# Altium PCB ST7789_PCB.PcbDoc
Units mil, origin at the board's own origin, x right, y up, seen from the top; angles counter-clockwise.
Board outline 1640 x 725 mil, 2 copper layers (Top Layer, Bottom Layer); 9 components, 10 nets, 40 pads, 7 vias.
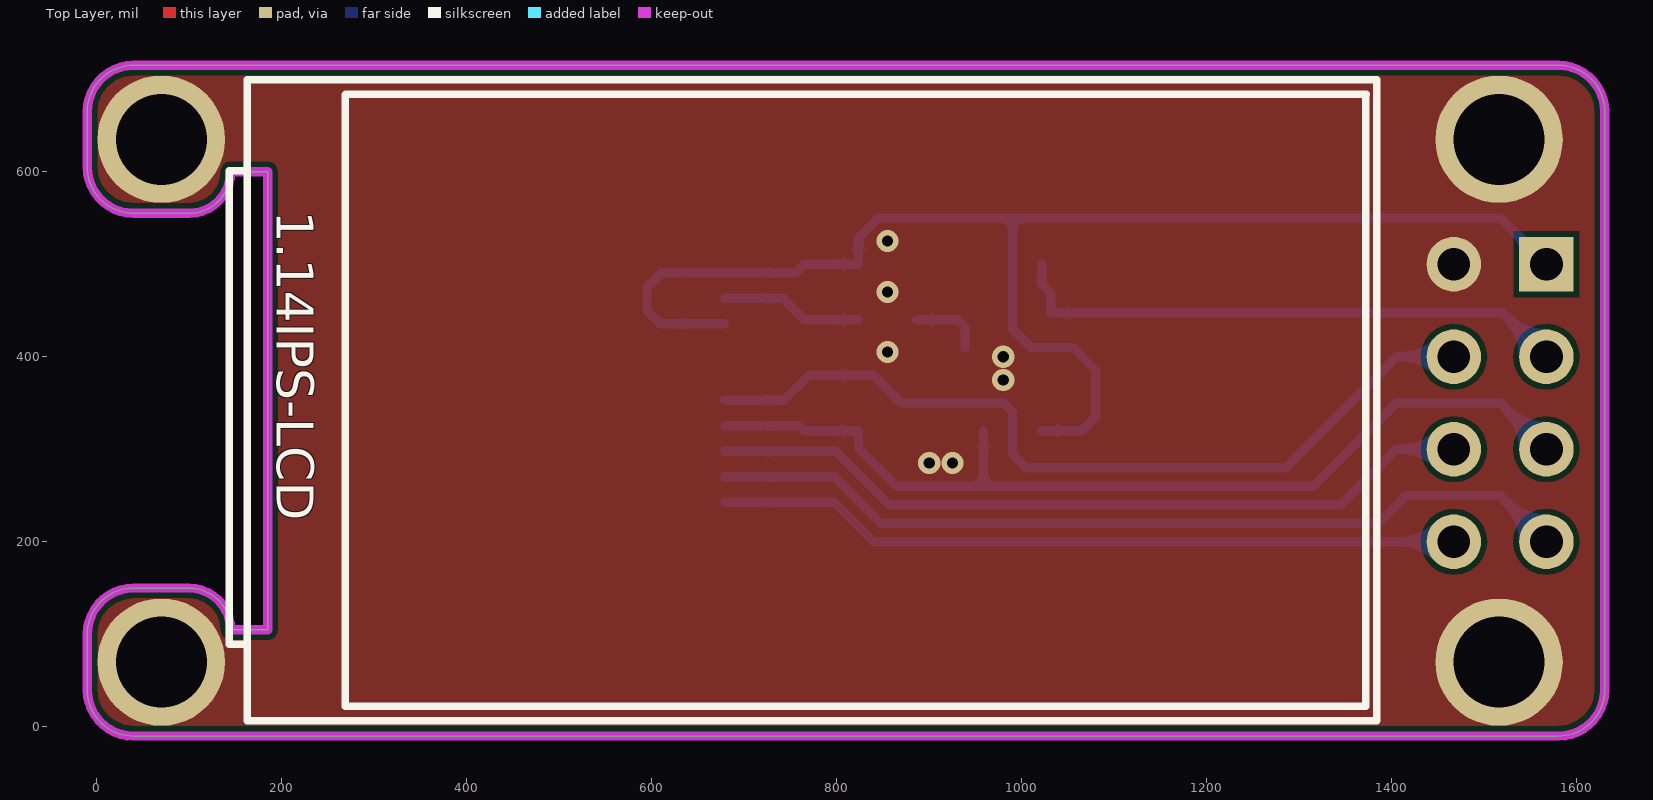
[diagram p0: Top Layer view]
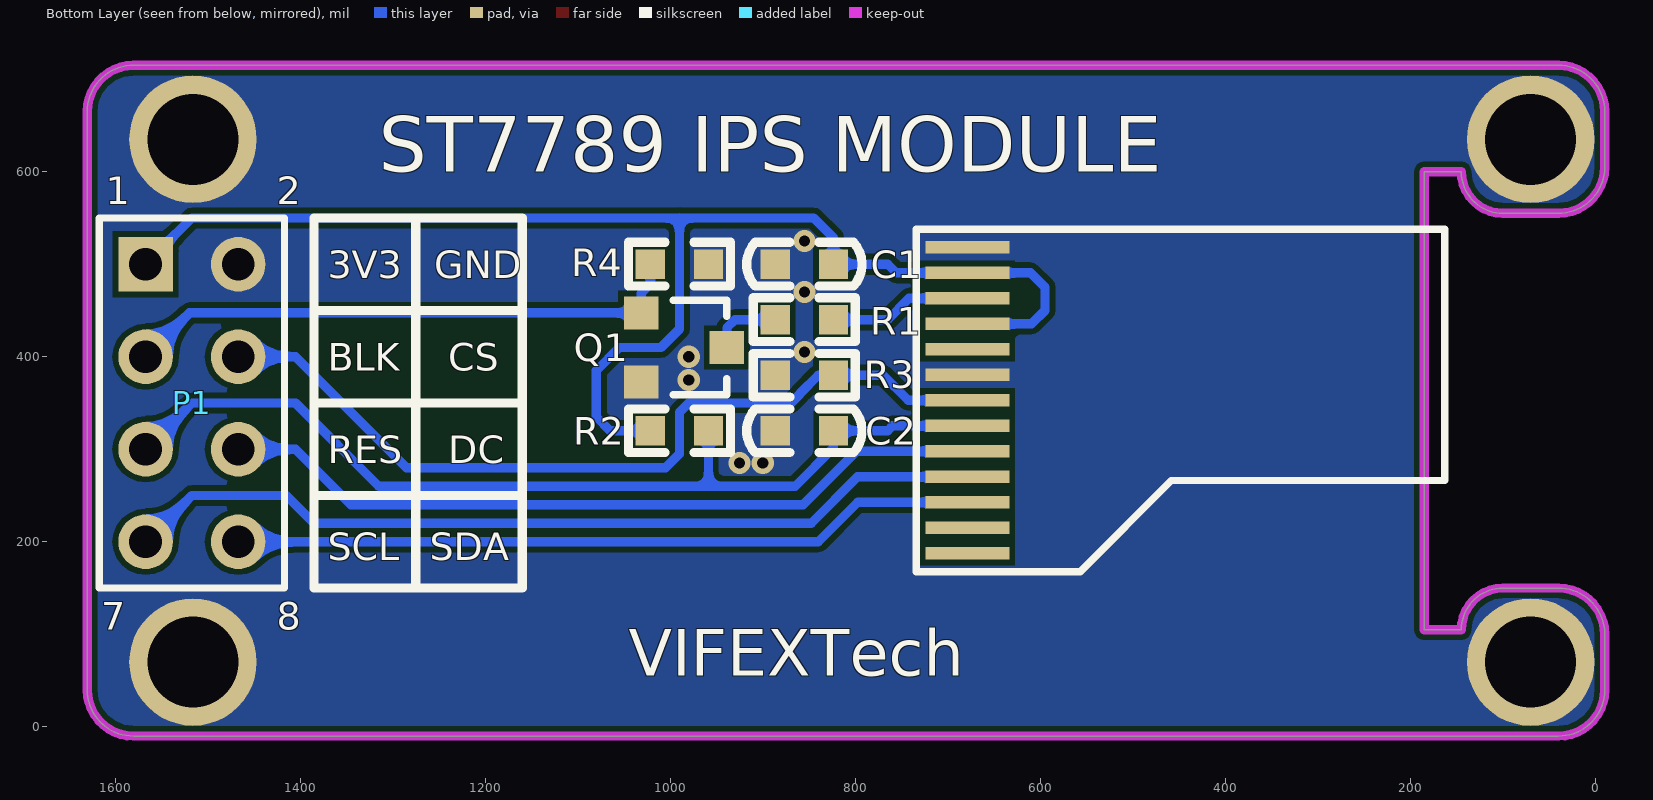
[diagram p1: Bottom Layer view, seen from below]

## Layer stack, top to bottom
Top Solder: solder mask 0.4, Solder Resist, Dk 3.5
Top Layer: signal copper 1.4
Dielectric 1: dielectric 12.6, FR-4, Dk 4.8
Bottom Layer: signal copper 1.4
Bottom Solder: solder mask 0.4, Solder Resist, Dk 3.5

## Board outline
40,-10 cw(c40,40) -10,40 -10,100 cw(c40,100) 40,150 100,150 cw(c100,105) 145,105 185,105 185,600 145,600 cw(c100,600) 100,555 40,555 cw(c40,605) -10,605 -10,665 cw(c40,665) 40,715 1580,715 cw(c1580,665) 1630,665 1630,40 cw(c1580,40) 1580,-10

## Design rules (kind name [scope] priority, off if disabled: settings)
Clearance [All] p1: gap=6
HoleSize [All] p1 off: absolutevalues=TRUE maxlimit=100 minlimit=1 maxpercent=80.000 minpercent=20.000
HoleToHoleClearance [All] p1 off: gap=10 allowstackedmicrovias=TRUE
LayerPairs [All] p1 off: enforce=TRUE
MinimumSolderMaskSliver [All] p1 off: minsoldermaskwidth=10
NetAntennae [All] p1 off: netantennaetolerance=0
NetAntennae NetAntennae_1 [All] p2 off: netantennaetolerance=0
PlaneConnect [All] p1: planeconnectstyle=Direct reliefexpansion=20 reliefentries=4 reliefconductorwidth=10 reliefairgap=10
PolygonConnect [All] p1: connectstyle=Direct reliefconductorwidth=10 reliefentries=4 polygonreliefangle="90 Angle" airgapwidth=10
RoutingVias [All] p1: holewidth=28 width=50 viastyle="Through Hole" minholewidth=28 minwidth=50 maxholewidth=28 maxwidth=50
SilkToSilkClearance [All] p1 off: silktosilkclearance=10
SilkToSolderMaskClearance [IsPad] p1 off: minsilkscreentomaskgap=10 clearancetoexposedcopper=TRUE
SolderMaskExpansion [All] p1: expansion=4
Width [All] p1: maxlimit=100 minlimit=6 preferedwidth=6
22 further rules are at their usual default settings.

## Components (designator, comment, footprint, x,y, rotation, side; value= is the part's Value field where it differs from the comment)
C1 "105" 电容_C0603 855,500 r180 bottom
C2 "104" 电容_C0603 855,320 r180 bottom
P1 "Port" HDR2X4 1566.93,500 r270 bottom
Q1 "AON6512" MOS_SOT-23 985,410 r270 bottom
R1 "100R" 电阻_R0603 855,440 r180 bottom
R2 "10K" 电阻_R0603 990,320 r0 bottom
R3 "10K" 电阻_R0603 855,380 r180 bottom
R4 "10K" 电阻_R0603 990,500 r0 bottom
"ST7789 IPS MODULE" "IPS-LCD" 1.14IPS-LCD 415,1030 r180 top locked (schematic designator U1)

## Footprints (in the part's own frame and the unit in brackets; to place one, negate y for a bottom-side part, rotate by r counter-clockwise, add the part's x,y. Pads: shape width x height; smd on the part's side, far side on the other; paste and mask are expansions set on the pad)
1.14IPS-LCD [mm] "1.14寸IPS-LCD裸屏SPI接口"
  rect 2.3x0.35 smd far side: 1(-6.7,21.4) 2(-6.7,20.7) 3(-6.7,20) 4(-6.7,19.3) 5(-6.7,18.6) 6(-6.7,17.9) 7(-6.7,17.2) 8(-6.7,16.5) 9(-6.7,15.8) 10(-6.7,15.1) 11(-6.7,14.4) 12(-6.7,13.7) 13(-6.7,13)
  silkscreen extent -24.6,8.4 6.9,26
HDR2X4 [mm] "Connector; Header; 4x2 Position"
  rect 1.5x1.5 hole 0.9: 1(0,0)
  round 1.5 hole 0.9: 2(0,2.54) 3(2.54,0) 4(2.54,2.54) 5(5.08,0) 6(5.08,2.54) 7(7.62,0) 8(7.62,2.54)
  silkscreen extent -1.27,-1.27 8.89,3.81
MOS_SOT-23 [mm]
  rect 0.9x0.95 smd: 1(-0.95,-1.175) 2(0,1.175) 3(0.95,-1.175)
  silkscreen extent -1.3,-0.3 1.3,1.18, body extent -1.45,-1.4 1.45,1.4, height 1.2
电容_C0603 [mm]
  rect 0.8x0.8 smd: 1(-0.8,0) 2(0.8,0)
  silkscreen extent -1.58,-0.6 1.58,0.6, body extent -0.8,-0.4 0.8,0.4, height 0.3
电阻_R0603 [mm]
  rect 0.8x0.8 smd: 1(-0.8,0) 2(0.8,0)
  silkscreen extent -1.4,-0.6 1.4,0.6, body extent -0.8,-0.4 0.8,0.4, height 0.45

## Part data
C1 C2: library part cap
P1: library part "Header 4X2", "Header, 4-Pin, Dual row"
Q1: library part MOSFET-N
R1 R2 R3 R4: library part Res
"ST7789 IPS MODULE": library part IPS-LCD-1.14, "IPS-LCD-1.14寸裸屏spi接口"

## Free pads (board coordinates)
  round 137.8 hole 98.43 mask+4: ""(70,70) ""(70,635) ""(1515.75,70) ""(1515.75,635)

## Via types
v1: diameter 24, hole 12, Top Layer to Bottom Layer, tented both sides, 7 vias

## Nets (pads, with @x,y where several pads share a name; then routed paths per layer and width w, separated by ;. In a path a pad name is that pad's centre, name@x,y a point inside that pad or via, vN(x,y) a via of type N, cw(c..) or ccw(c..) an arc to the next point about the centre after c; other vN are vias at no path point)
3V3: "ST7789 IPS MODULE.10" "ST7789 IPS MODULE.12" C1.2 P1.1 R2.2 | length 1498.5
  Bottom Layer w10: 678.78,435.51 609.49,435.51 595,450 595,475 610.63,490.63 678.78,490.63 755.63,490.63 765,500 C1.2 823.5,528.5 845,550 990,550 ; R2.2 1065,320 1080,335 1080,385 1055,410 1010,410 990,430 990,550 ; P1.1 1516.93,550 990,550
GND: "ST7789 IPS MODULE.8" "ST7789 IPS MODULE.13" C1.1 C2.1 P1.2 pad. Q1.3 R3.1 R4.1
  other v1: 900,285 925,285 980,375 980,400 855,405 855,470 855,525
NetQ1_2: Q1.2 R1.1 | length 77.1
  Bottom Layer w10: R1.1 930,440 938.74,431.26 Q1.2
TFT_BLK: P1.3 Q1.1 R4.2 | length 611.9
  Bottom Layer w10: R4.2 1021.5,478.5 1031.26,468.74 Q1.1 1519.53,447.4 P1.3
TFT_CS: "ST7789 IPS MODULE.7" P1.4 R3.2 | length 917.2
  Bottom Layer w10: 678.78,352.83 742.83,352.83 770,380 R3.2 840,380 859.75,360.25 859.75,359.7 869.44,350 980,350 990,340 990,295 1005,280 1285,280 1405,400 P1.4
TFT_DC: "ST7789 IPS MODULE.5" P1.6 | length 836.9
  Bottom Layer w10: 678.78,297.72 798.73,297.72 856.45,240 1345,240 1405,300 P1.6
TFT_LEDK: "ST7789 IPS MODULE.11" R1.2 | length 154.3
  Bottom Layer w10: 678.78,463.07 741.93,463.07 765,440 R1.2
TFT_RES: "ST7789 IPS MODULE.6" C2.2 P1.5 R2.1 | length 1044
  Bottom Layer w10: 678.78,325.28 759.72,325.28 765,320 C2.2 823.5,301.5 865,260 1315,260 1405,350 1516.93,350 P1.5 ; 958.5,260 R2.1
TFT_SCL: "ST7789 IPS MODULE.4" P1.7 | length 942.1
  Bottom Layer w10: 678.78,270.16 797.47,270.16 847.63,220 1385,220 1415,250 1516.93,250 P1.7
TFT_SDA: "ST7789 IPS MODULE.3" P1.8 | length 805.8
  Bottom Layer w10: 678.78,242.6 797.4,242.6 840,200 P1.8
pads on no net: "ST7789 IPS MODULE.1" "ST7789 IPS MODULE.2" "ST7789 IPS MODULE.9"

## Polygon pours and split planes (outlines as drawn)
GND on Bottom Layer "GND" (solid, remove dead copper, pour order 0): -95,765 -65,795 1710,795 1710,-140 1725,-155 1700,-130 -155,-130
GND on Top Layer "GND" (solid, remove dead copper, pour order 2): -130,800 1745,800 1765,780 1760,775 1760,-110 -140,-110 -145,-105

## Keep-outs
Keep-Out Layer:
  lines w10: -10,40 ccw(c40,40) 40,-10 70,-10 1580,-10 ccw(c1580,40) 1630,40 1630,665 ccw(c1580,665) 1580,715 40,715 ccw(c40,665) -10,665 -10,605 ccw(c40,605) 40,555 100,555 ccw(c100,600) 145,600 185,600 185,555 185,150 185,105 145,105 ccw(c100,105) 100,150 40,150 ccw(c40,100) -10,100 -10,40

## Silkscreen, mask and mechanical layers (free items; w line width, h text height)
Bottom Overlay:
  lines w10: 1160,250 1385,250 ; 1160,350 1385,350 ; 1160,450 1385,450 ; 1272.5,150 1275,150 1275,550 ; 1160,150 1160,550 1385,550 1385,150 1160,150
  text "GND" at 1255,485 h30
  text "3V3" at 1370,485 h30
  text "CS" at 1240,385 h30
  text "BLK" at 1370,385 h30
  text "DC" at 1240,285 h30
  text "RES" at 1370,285 h30
  text "SDA" at 1260,180 h30
  text "SCL" at 1370,180 h30
  text "VIFEXTech" at 1045,55 h50
Mechanical 1:
  lines w10: -10,40 ccw(c40,40) 40,-10 70,-10 1580,-10 ccw(c1580,40) 1630,40 1630,665 ccw(c1580,665) 1580,715 40,715 ccw(c40,665) -10,665 -10,605 ccw(c40,605) 40,555 100,555 ccw(c100,600) 145,600 185,600 185,555 185,150 185,105 145,105 ccw(c100,105) 100,150 40,150 ccw(c40,100) -10,100 -10,40

## Text inside footprints (layer, text, board x,y; h text height)
P1: Bottom Overlay "2" at 1425,565 h30; Bottom Overlay "1" at 1610,565 h30; Bottom Overlay "7" at 1615,105 h30; Bottom Overlay "8" at 1425,105 h30
"ST7789 IPS MODULE": Top Overlay "1.14IPS-LCD" at 194.53,557.56 h40 r270